# EAGLE board AXAWIFI (EAGLE 9.5.0)
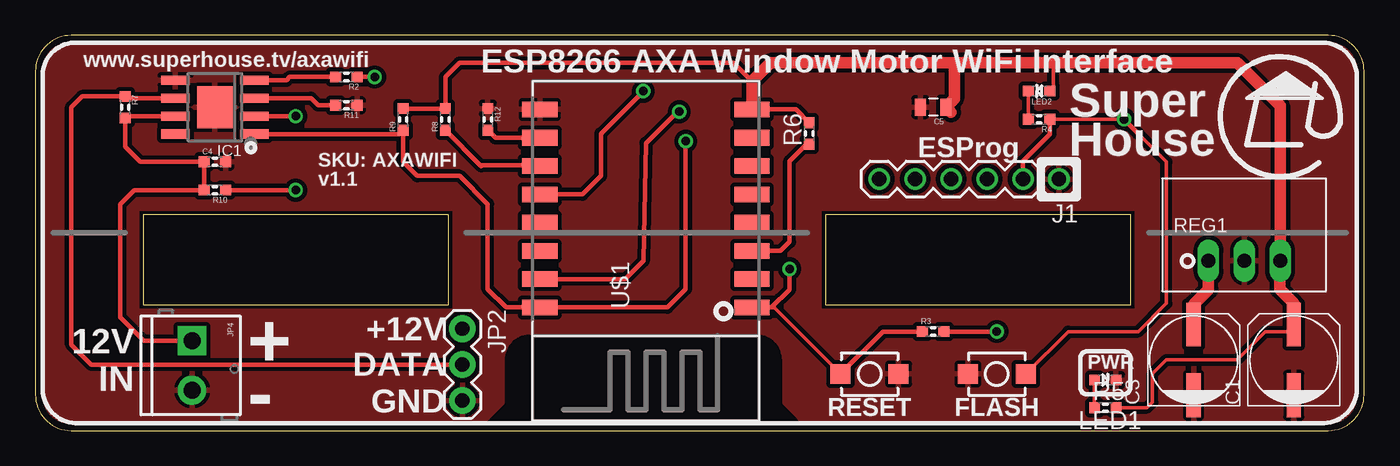
[diagram p0: board, top side]
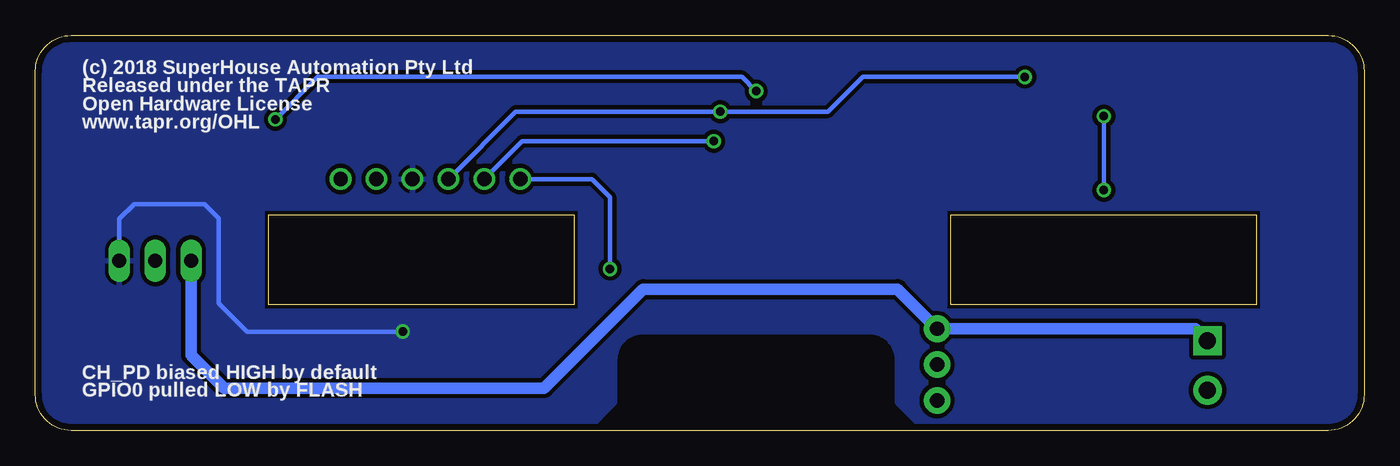
[diagram p1: board, bottom side, seen from below]

Size 93.98 x 27.94 mm. Coordinates in mm from the lower left corner, seen from the top.
Outline: 0,2.54 arc90 2.54,0 91.44,0 arc90 93.98,2.54 93.98,25.4 arc90 91.44,27.94 2.54,27.94 arc90 0,25.4 0,2.54
Copper layers (1*16): Top 0.035mm / dielectric 1.5mm / Bottom 0.035mm
Design rules "default *": minimum track width 10mil, minimum drill 24mil, track to track 12mil, track to pad 12mil, pad to pad 12mil, via to via 12mil, smd to smd 8mil, copper to edge 18mil, drill to drill 8mil, minimum pad ring 10mil, minimum via ring 8mil, stop-mask expansion 3mil, vias tented up to drill 24mil, thermal gap 10mil
tRestrict: area 7.4,8.6 to 29.5,15.5; area 55.6,8.6 to 77.7,15.5
bRestrict: area 7.4,8.6 to 29.5,15.5; area 55.6,8.6 to 77.7,15.5
Milling: 8 lines

## Footprints (pad centres in the part's own frame; a part is rotated, then mirrored left to right if it is on the bottom)
UD-6,3X5,8_NICHICON = smd 3.1 x 1: + 2.5,0; - -2.5,0
C0603 = smd 0.762 x 0.762: 1 -0.762,0; 2 0.762,0
C0805 = smd 0.8 x 1.2: 1 -0.9,0; 2 0.9,0
SOIC8T = smd 2.032 x 0.66: 1 -2.794,1.905; 2 -2.794,0.635; 3 -2.794,-0.635; 4 -2.794,-1.905; 5 2.794,-1.905; 6 2.794,-0.635; 7 2.794,0.635; 8 2.794,1.905 | smd 2.489 x 2.997: TGND 0,0
ESPROG-S = drill 1.016: 1 0,0; 2 2.54,0; 3 5.08,0; 4 7.62,0; 5 10.16,0; 6 12.7,0
1X03 = drill 1.016 pad 1.88: 1 0,0; 2 2.54,0; 3 5.08,0
SCREWTERMINAL-3.5MM-2 = drill 1.2 pad 2.032 square: 1 0,0 | drill 1.2 pad 2.032: 2 3.5,0
LED-0603 = smd 0.762 x 0.762: A -0.762,0; C 0.762,0
R0603 = smd 0.762 x 0.762: 1 -0.762,0; 2 0.762,0
K78XX-500R3 = drill 1 long: 1 -2.54,0; 2 0,0; 3 2.54,0
TACTILE_SMT_3X4X2 = smd 1.4 x 1.4: 1 -2.05,0; 2 2.05,0
ESP12 = smd 1.1 x 2.5: 1 -4,-7.5; 2 -2,-7.5; 3 0,-7.5; 4 2,-7.5; 5 4,-7.5; 6 6,-7.5; 7 8,-7.5; 8 10,-7.5; 9 10,7.5; 10 8,7.5; 11 6,7.5; 12 4,7.5; 13 2,7.5; 14 0,7.5; 15 -2,7.5; 16 -4,7.5

## Placement (x,y rotation side)
C1  22uF 40V  [UD-6,3X5,8_NICHICON]  89,5 90 top
C3  22uF 40V  [UD-6,3X5,8_NICHICON]  81.92,5 90 top
C4  100nF 50V  [C0603]  12.7,19 0 top
C5  10uF  [C0805]  63.5,22.86 180 top
IC1  MCP2003  [SOIC8T]  12.7,22.86 180 top
J1  ESPROG-SOCKET  [ESPROG-S]  72.39,17.78 180 top
JP2  [1X03]  30.21,7.2 270 top
JP4  [SCREWTERMINAL-3.5MM-2]  11.08,6.35 270 top
LED1  BLUE  [LED-0603]  75.67,3.57 0 top
LED2  RED  [LED-0603]  71,24 180 top
R2  1K  [R0603]  22,25 180 top
R3  10K  [R0603]  63.5,7 0 top
R4  1K  [R0603]  71,22 180 top
R5  2K2  [R0603]  75.67,1.62 0 top
R6  10K  [R0603]  54.73,21 90 top
R7  4K7  [R0603]  6.35,22.86 270 top
R8  10K  [R0603]  29,22 90 top
R9  4K7  [R0603]  26,22 90 top
R10  22K  [R0603]  12.7,17 180 top
R11  22K  [R0603]  22,23 180 top
R12  10K  [R0603]  32,22 270 top
REG1  K7833-500R3  [K78XX-500R3]  85.5,12 0 top
SW1  RESET  [TACTILE_SMT_3X4X2]  59,4 0 top
SW2  REFLASH  [TACTILE_SMT_3X4X2]  68,4 0 top
U$1  ESP12-SMT  [ESP12]  43.18,12.7 90 top

## Library data of the parts
C1 C3 = analyzer
C4 C5 R2-R12 = SuperHouse-DiscreteSemi
IC1 JP2 = freetronics-jon
J1 JP4 = SuperHouse-Connectors
LED1 LED2 = SuperHouse-LEDs
REG1 = SuperHouse-Regulators
SW1 SW2 = SuperHouse-Switches
U$1 = SuperHouse-MCUs

## Nets
3.3V: C1.+ C5.1 J1.3 LED2.A R3.2 R5.2 R6.2 R8.2 R9.2 REG1.3 U$1.8
!RST: J1.6 R3.1 SW1.1 U$1.1
+12V: C3.+ C4.1 IC1.7 JP2.1 JP4.1 R7.2 R10.2 REG1.1
ADC: U$1.2
CH_PD: R6.1 U$1.3
DATA: IC1.6 JP2.2 R7.1
GND: C1.- C3.- C4.2 C5.2 IC1.5 IC1.TGND J1.1 JP2.3 JP4.2 LED1.C R11.1 R12.1 REG1.2 SW1.2 SW2.1 U$1.9
GPIO0: J1.2 R4.1 SW2.2 U$1.12
GPIO2: R8.1 U$1.11
GPIO4: U$1.14
GPIO5: U$1.13
GPIO12: U$1.6
GPIO13: U$1.7
GPIO14: U$1.5
GPIO15: R12.2 U$1.10
GPIO16: U$1.4
LINTX: IC1.4 R2.2
N$5: IC1.2 R10.1
N$6: IC1.3 R11.2
N$14: LED1.A R5.1
N$20: LED2.C R4.2
RX: J1.4 R2.1 U$1.15
TX: IC1.1 J1.5 R9.1 U$1.16

## Tracks (layer width: path | path; a pad name or v marks a point on that pad's centre or on a via)
3.3V  (via drill 0.6)
  Top 0.254: LED2.A 72,24.24 72,26 | R5.2 78.62,1.62 79,2 79,4 80,5 85,5 87,7 89,7 C1.+
  Top 0.305: R9.2 R8.2 29,25 30,26 49.36,26 50.68,24.68 | R3.2 v68,7 | R6.2 53.79,22.7 U$1.8
  Top 0.813: 65,26 72,26 85,26 88.04,22.96 REG1.3 88,11.96 88,10 89,9 C1.+ | 65,26 52,26 50.68,24.68 U$1.8 | 65,26 65,23.46 C5.1 64.77,22.49
  Bottom 0.305: v68,7 79,7 81,9 81,15 82,16 87,16 88.04,14.96 REG1.3
  pour Bottom: 0,25.4 arc-90 2.54,27.94 91.44,27.94 arc-90 93.98,25.4 93.98,2.54 arc-90 91.44,0 55,0 53,2 53,5 arc90 51,7 35,7 arc90 33,5 33,2 31,0 2.54,0 arc-90 0,2.54
!RST  (via drill 0.6)
  Top 0.254: SW1.1 52.25,8.7
  Top 0.305: R3.1 59.95,7 SW1.1 | U$1.1 52.07,8.7 | 52.07,8.7 52.25,8.7 | v53.34,11.43 53.34,9.97 52.07,8.7
  Bottom 0.305: J1.6 54.61,17.78 53.34,16.51 v53.34,11.43
+12V
  Top 0.305: IC1.7 6.48,22.23 R7.2 6.35,20.05 7.4,19 C4.1 R10.2 7,17 6,16 6,8 7.65,6.35 JP4.1
  Top 0.813: C3.+ 81.92,8.92 82.96,9.96 REG1.1
  Bottom 0.813: JP4.1 11.93,7.2 JP2.1 33,10 51,10 58,3 80.62,3 82.96,5.34 REG1.1
CH_PD
  Top 0.305: U$1.3 52.7,12.7 53.34,13.34 53.34,19.05 54.53,20.24 R6.1
DATA
  Top 0.305: IC1.6 6.48,23.5 R7.1 3.3,23.62 2.54,22.86 2.54,6.08 3.96,4.66 JP2.2
GND
  pour Top: 0,25.4 arc-90 2.54,27.94 91.44,27.94 arc-90 93.98,25.4 93.98,2.54 arc-90 91.44,0 55,0 53,2 53,5 arc90 51,7 35,7 arc90 33,5 33,2 31,0 2.54,0 arc-90 0,2.54
GPIO0  (via drill 0.6)
  Top 0.254: SW2.2 73.05,7 78,7 80,9 80,19 78,21 | v77,22 R4.1
  Top 0.305: v43,24 40,21 40,18 38.7,16.7 U$1.12 | v77,22 78,21 | R4.1 71.76,20.96 69.85,19.05 J1.2
  Bottom 0.305: v43,24 44,25 74,25 v77,22
GPIO2
  Top 0.305: 31.54,18.7 31.47,18.77 | 31.47,18.77 R8.1 | 31.47,18.77 35.61,18.77 U$1.11
GPIO15
  Top 0.305: R12.2 32.54,20.7 U$1.10
LINTX
  Top 0.305: IC1.4 17.77,24.77 18,25 R2.2
N$5  (via drill 0.6)
  Top 0.305: IC1.2 v18.41,22.23 | v18.41,17 R10.1
  Bottom 0.305: v18.41,22.23 v18.41,17
N$6
  Top 0.305: IC1.3 19.5,23.5 20,23 R11.2
N$14
  Top 0.254: LED1.A R5.1
N$20
  Top 0.254: R4.2 LED2.C
RX  (via drill 0.6)
  Top 0.305: v45.54,22.54 45.4,22.54 43.18,20.32 43,12 41.7,10.7 U$1.15 | v24,25 R2.1
  Bottom 0.305: v24,25 35.46,25 37.92,22.54 v45.54,22.54 60.01,22.54 J1.4
TX  (via drill 0.6)
  Top 0.305: v46,20.46 46,10 44.7,8.7 U$1.16 33.3,8.7 32,10 32,16 30,18 27,18 26,19 R9.1 | IC1.1 25.72,20.95 R9.1 | 26,21 R9.1
  Bottom 0.305: v46,20.46 59.55,20.46 J1.5

## Text on the board
tPlace: www.superhouse.tv/axawifi | ESP8266 AXA Window Motor WiFi Interface | ESProg | Super / House | SKU: AXAWIFI / v1.1 | +12V | 12V / IN | DATA | + | PWR | GND | - | RESET | FLASH
bPlace: (c) 2018 SuperHouse Automation Pty Ltd / Released under the TAPR / Open Hardware License / www.tapr.org/OHL | CH_PD biased HIGH by default / GPIO0 pulled LOW by FLASH
tDocu: A | K | A | K